# EAGLE board SolarCellX_v2 (EAGLE 9.2.2)
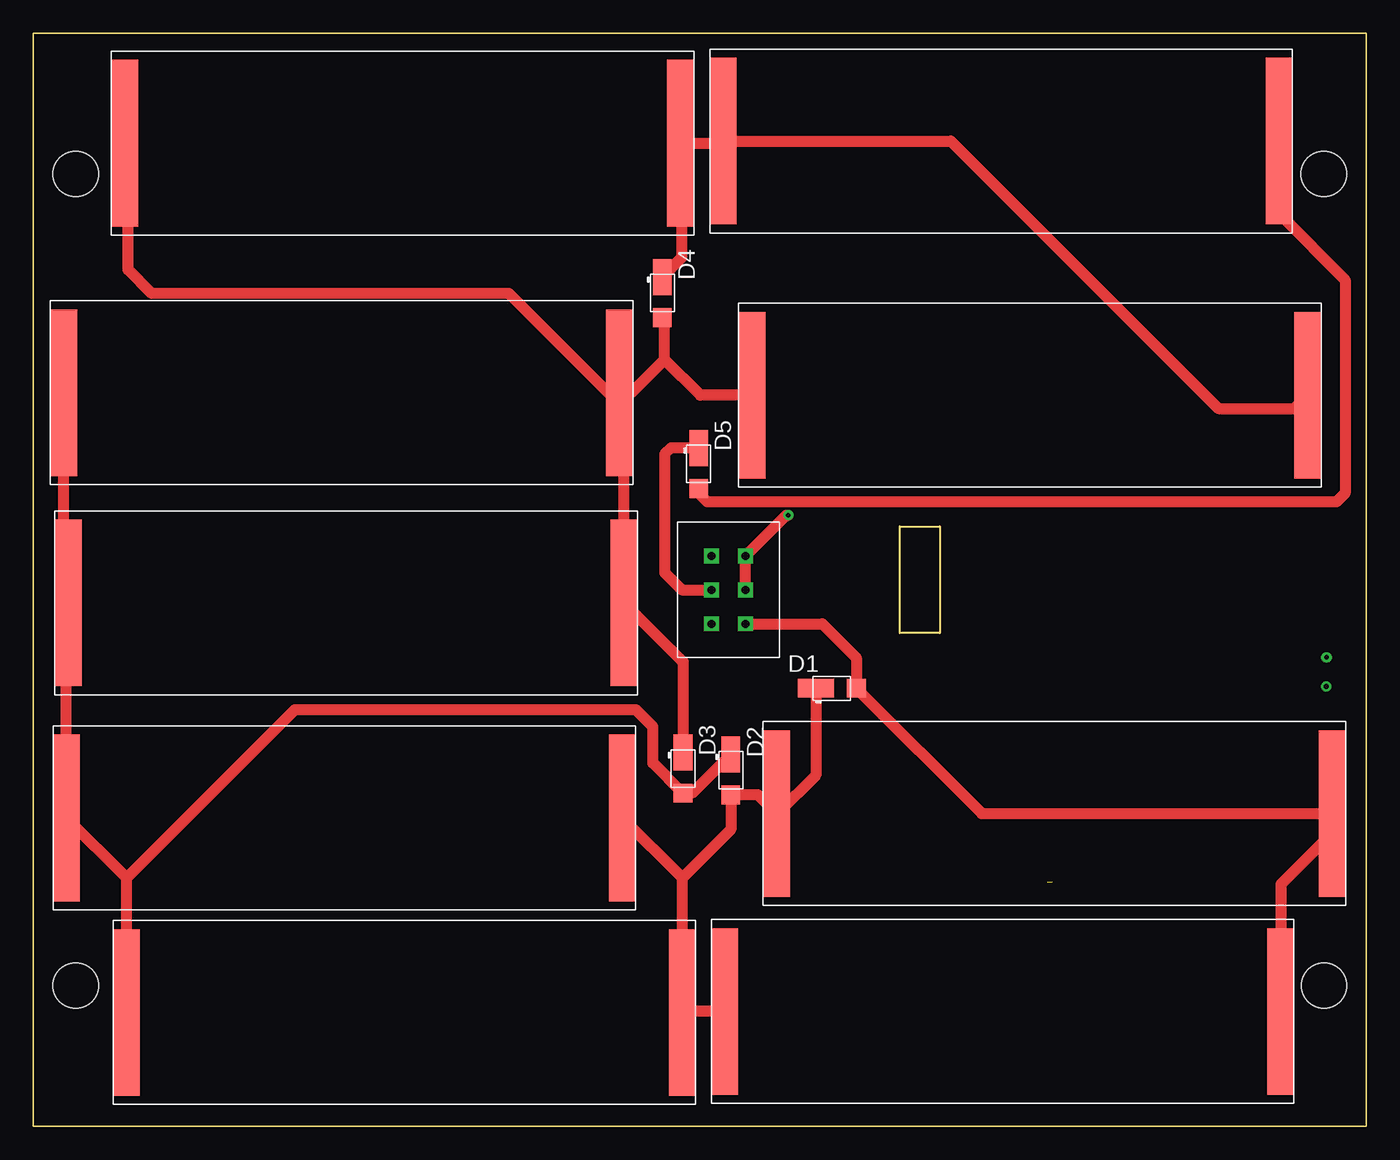
[diagram p0: board, top side]
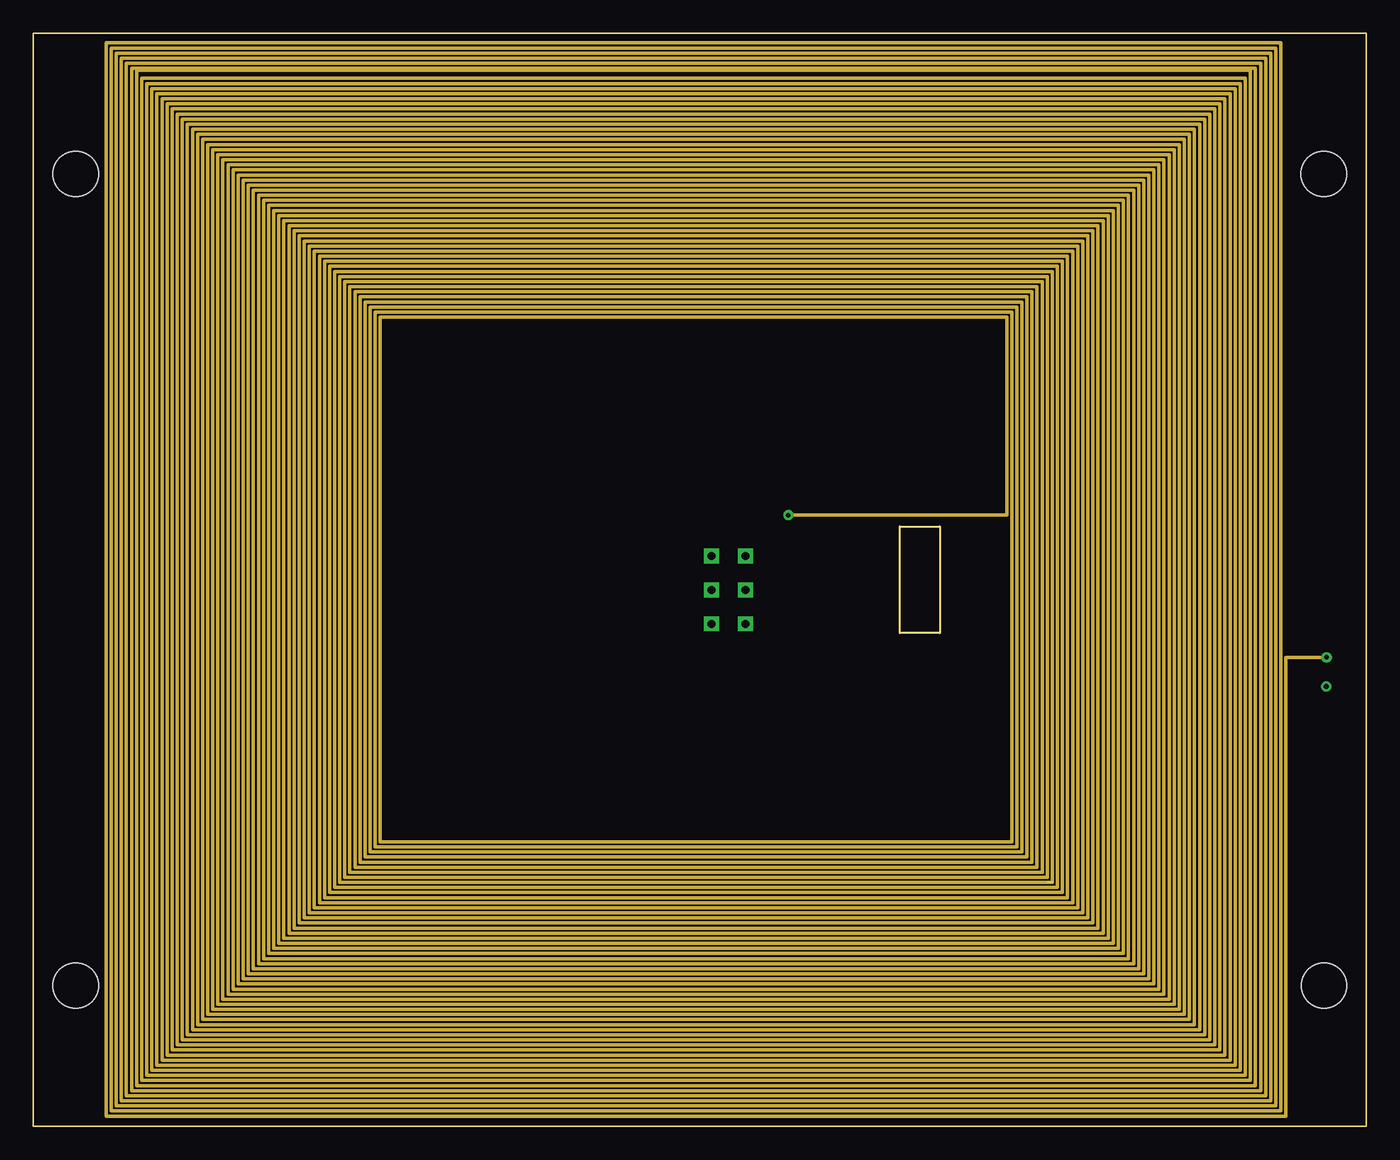
[diagram p1: board, inner layer Route2]
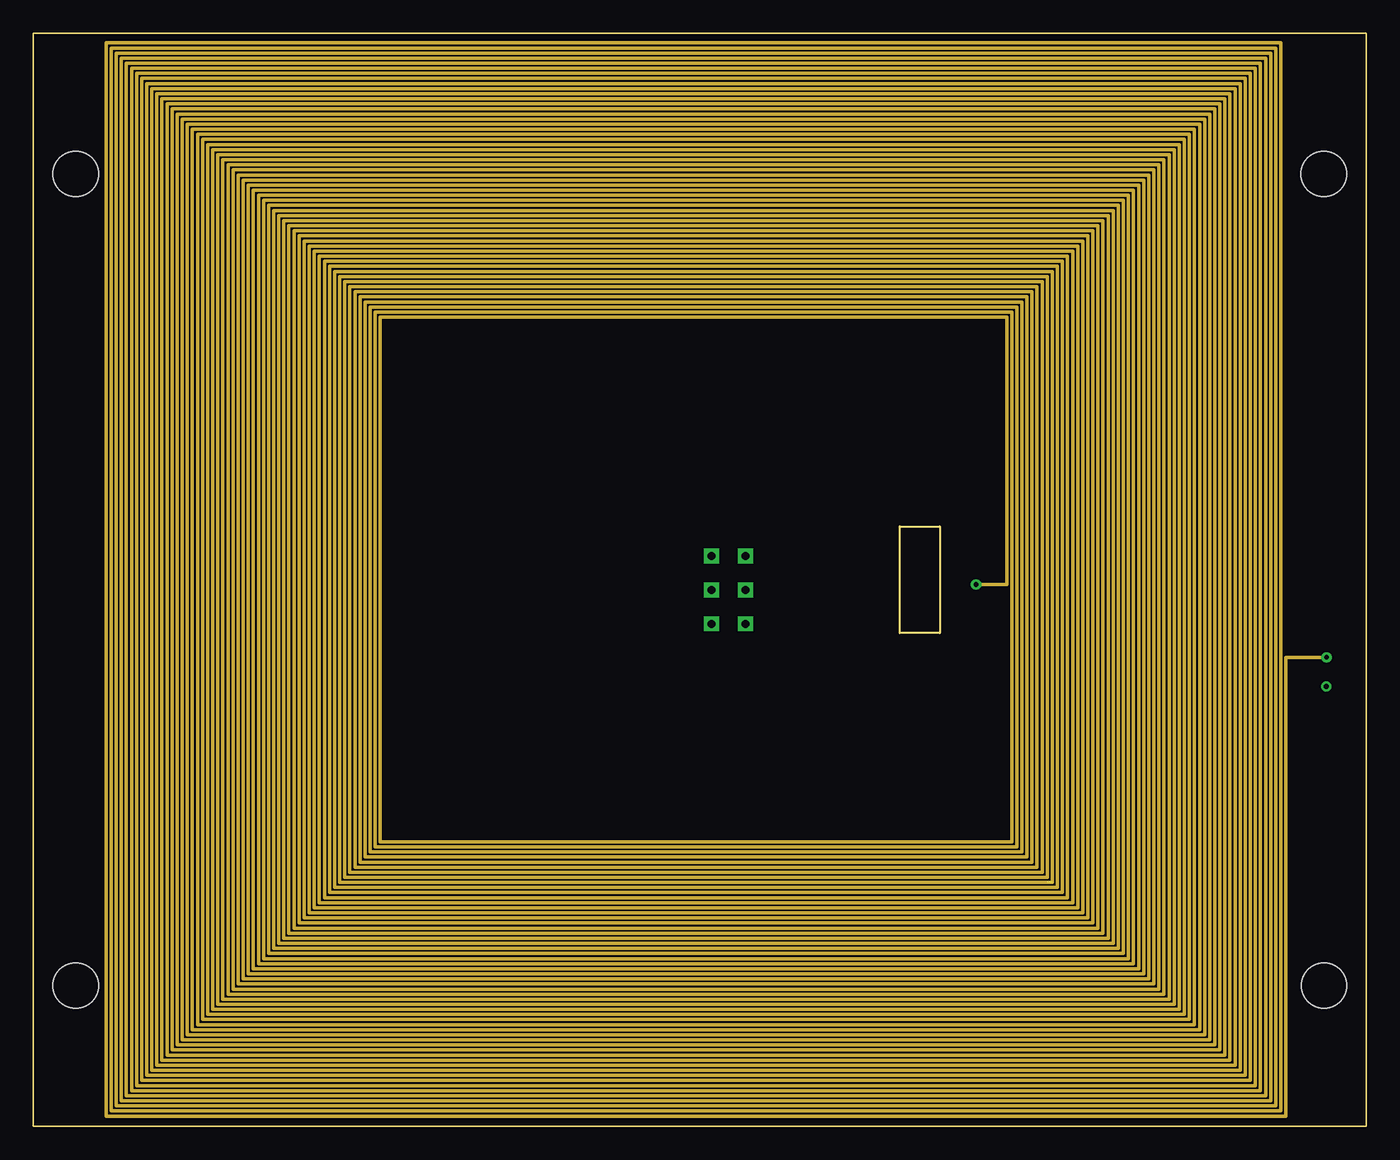
[diagram p2: board, inner layer Route15]
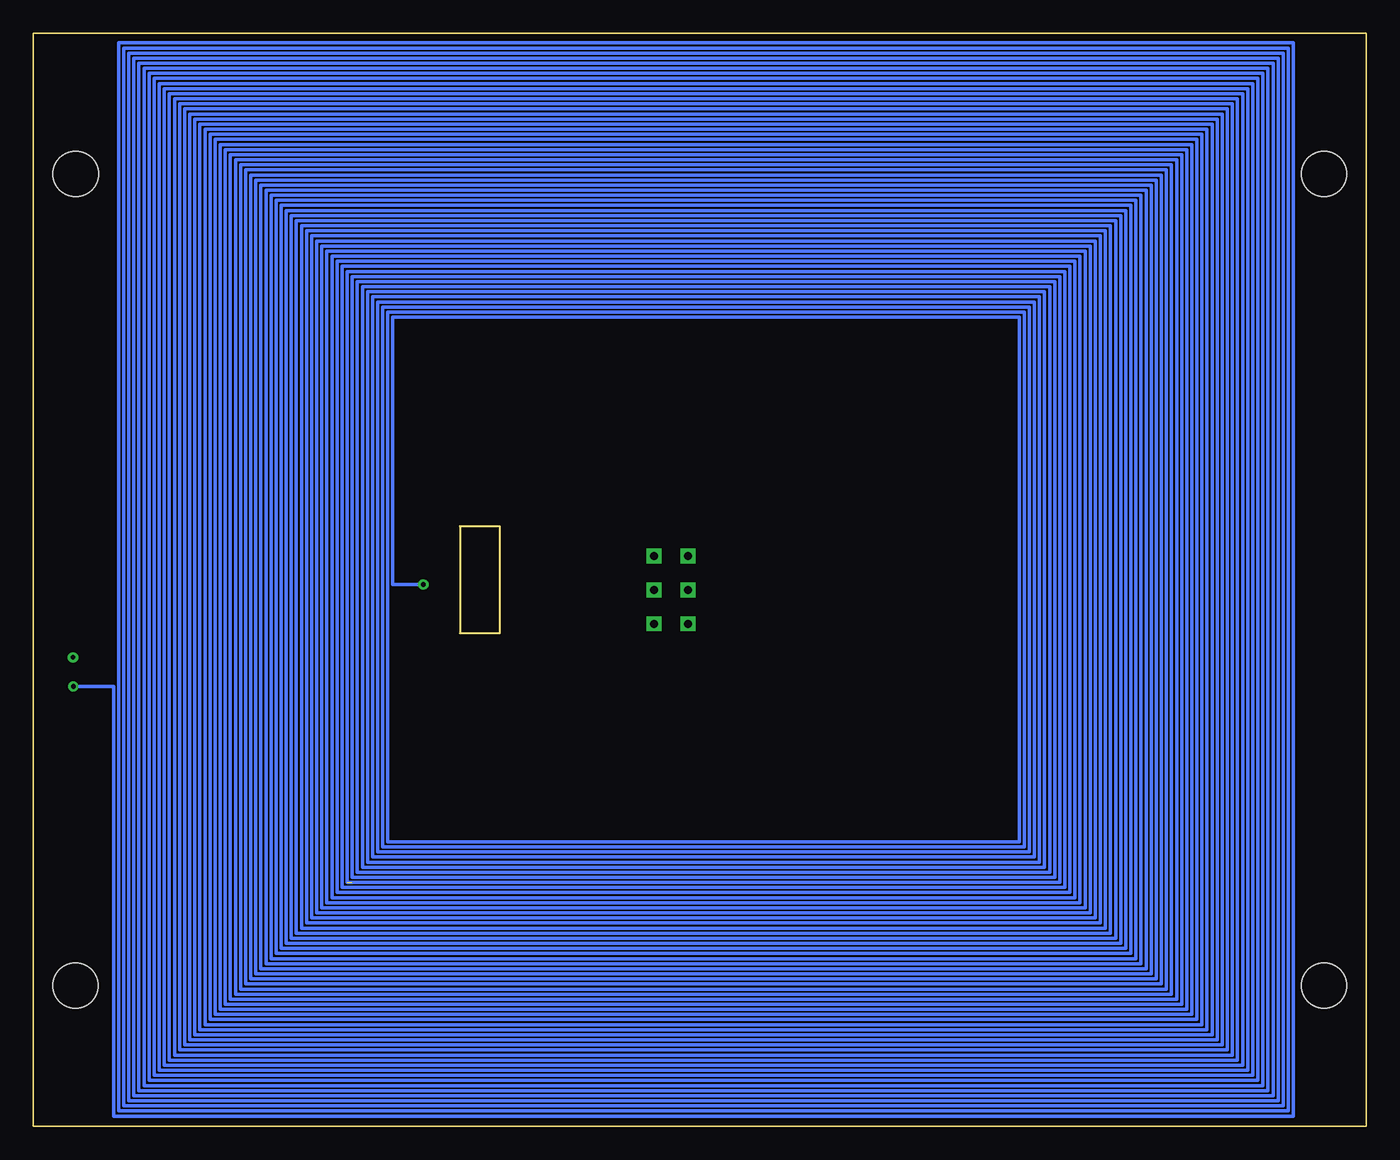
[diagram p3: board, bottom side, seen from below]

Size 100 x 82 mm. Coordinates in mm from the lower left corner, seen from the top.
Outline: 0,0 0,82 100,82 100,0 0,0
Outline: 65,45 68,45 68,37 65,37 65,45
Copper layers ([2:1+2*15+16:15]): Top 0.035559375mm / dielectric 0.17018125mm / Route2 0.01778125mm / dielectric 47mil / Route15 0.01778125mm / dielectric 0.17018125mm / Bottom 0.035559375mm
Design rules "default *": minimum track width 6mil, minimum drill 0.35mm, track to track 5mil, track to pad 6mil, pad to pad 6mil, via to via 6mil, smd to smd 6mil, copper to edge 20mil, drill to drill 6mil, minimum pad ring 10mil, minimum via ring 8mil, stop-mask expansion 4mil, vias tented up to drill 0mil, thermal gap 10mil
Holes 3.4 mm at 3.17,10.55 96.82,71.45 3.17,71.45 96.83,10.55

## Footprints (pad centres in the part's own frame; a part is rotated, then mirrored left to right if it is on the bottom)
SLMD121H04L = smd 2 x 12.5: P$1 1,6.9; P$2 42.7,6.9
SB_DIODE = smd 2.7 x 1.4: NEG -1.2,0 | smd 1.4 x 1.4: POS 1.85,0
6PIN_MOLEX = drill 0.6 square: P$1 2.54,2.54; P$2 5.08,2.54; P$3 7.62,2.54; P$4 7.62,5.08; P$5 5.08,5.08; P$6 2.54,5.08

## Placement (x,y rotation side)
1  SLMD121H04L  [SLMD121H04L]  50.77,67.02 0 top
11  SLMD121H04L  [SLMD121H04L]  94.58,15.51 180 top
12  SLMD121H04L  [SLMD121H04L]  98.46,30.36 180 top
13  SLMD121H04L  [SLMD121H04L]  49.69,15.44 180 top
14  SLMD121H04L  [SLMD121H04L]  45.18,30.03 180 top
21  SLMD121H04L  [SLMD121H04L]  1.61,32.37 0 top
22  SLMD121H04L  [SLMD121H04L]  1.28,48.13 0 top
23  SLMD121H04L  [SLMD121H04L]  5.85,66.86 0 top
24  SLMD121H04L  [SLMD121H04L]  52.92,47.95 0 top
D1  SB_DIODE  [SB_DIODE]  59.91,32.86 0 top
D2  SB_DIODE  [SB_DIODE]  52.34,26.71 270 top
D3  SB_DIODE  [SB_DIODE]  48.74,26.84 270 top
D4  SB_DIODE  [SB_DIODE]  47.19,62.52 270 top
D5  SB_DIODE  [SB_DIODE]  49.92,49.7 270 top
U$1  6PIN_MOLEX  [6PIN_MOLEX]  55.96,35.16 90 top

## Library data of the parts
1 11-14 21-24 D1-D5 U$1 = Solar

## Nets
GND: 11.P$1 12.P$1 D1.POS U$1.P$1
N$1: U$1.P$2 U$1.P$3
N$2: 11.P$2 12.P$2 13.P$1 14.P$1 D1.NEG D2.POS
N$3: 13.P$2 14.P$2 21.P$1 22.P$1 D2.NEG D3.POS
N$4: 1.P$1 23.P$2 24.P$2 D4.NEG
N$5: 21.P$2 22.P$2 23.P$1 24.P$1 D3.NEG D4.POS
N$6: 1.P$2 D5.POS
V_SOLAR: D5.NEG U$1.P$5

## Tracks (layer width: path | path; a pad name or v marks a point on that pad's centre or on a via)
GND
  Top 0.813: U$1.P$1 59.2,37.7 61.76,35.15 D1.POS 71.16,23.45 12.P$1 97.46,22.02 93.6,18.16 93.6,8.62 11.P$1
N$1  (via drill 0.35, 0.35 layers 1-2, 0.35 layers 15-16)  (1 unrouted)
  Top 0.813: U$1.P$2 U$1.P$3 56.49,45.85 v56.64,45.85
  Route2 0.152: 93.98,33 93.98,33.02
  Route2 0.254: 76.07,18.29 23.37,18.29 | v97.03,35.18 93.98,35.18 93.98,33 93.98,0.76 5.46,0.76 5.46,81.28 93.6,81.28 93.6,1.14 5.84,1.14 5.84,80.9 93.22,80.9 93.22,1.52 6.22,1.52 6.22,80.52 92.84,80.52 92.84,1.91 6.6,1.91 6.6,80.14 92.46,80.14 92.46,2.29 6.99,2.29 6.99,79.76 92.08,79.76 92.08,2.67 7.37,2.67 7.37,79.38 91.69,79.38 91.69,3.05 7.75,3.05 7.75,79.25 91.31,79.25 91.31,3.43 8.13,3.43 8.13,78.61 90.93,78.61 90.93,3.81 8.51,3.81 8.51,78.23 90.55,78.23 90.55,4.19 8.89,4.19 8.89,77.85 90.17,77.85 90.17,4.57 9.27,4.57 9.27,77.47 89.79,77.47 89.79,4.95 9.65,4.95 9.65,77.09 89.41,77.09 89.41,5.33 10.03,5.33 10.03,76.71 89.03,76.71 89.03,5.71 10.41,5.71 10.41,76.33 88.65,76.33 88.65,6.1 10.79,6.1 10.79,75.95 88.27,75.95 88.27,6.48 11.18,6.48 11.18,75.56 87.88,75.56 87.88,6.86 11.56,6.86 11.56,75.18 87.5,75.18 87.5,7.24 11.94,7.24 11.94,74.8 87.12,74.8 87.12,7.62 12.32,7.62 12.32,74.42 86.74,74.42 86.74,8 12.7,8 12.7,74.04 86.36,74.04 86.36,8.38 13.08,8.38 13.08,73.66 85.98,73.66 85.98,8.76 13.46,8.76 13.46,73.28 85.6,73.28 85.6,9.14 13.84,9.14 13.84,72.9 85.22,72.9 85.22,9.53 14.22,9.53 14.22,72.52 84.84,72.52 84.84,9.91 14.61,9.91 14.61,72.14 84.45,72.14 84.45,10.29 14.99,10.29 14.99,71.75 84.07,71.75 84.07,10.67 15.37,10.67 15.37,71.37 83.69,71.37 83.69,11.05 15.75,11.05 15.75,70.99 83.31,70.99 83.31,11.43 16.13,11.43 16.13,70.61 82.93,70.61 82.93,11.81 16.51,11.81 16.51,70.23 82.55,70.23 82.55,12.19 16.89,12.19 16.89,69.85 82.17,69.85 82.17,12.57 17.27,12.57 17.27,69.47 81.79,69.47 81.79,12.95 17.65,12.95 17.65,69.09 81.41,69.09 81.41,13.34 18.03,13.34 18.03,68.71 81.03,68.71 81.03,13.72 18.41,13.72 18.41,68.33 80.64,68.33 80.64,14.1 18.8,14.1 18.8,67.94 80.26,67.94 80.26,14.48 19.18,14.48 19.18,67.56 79.88,67.56 79.88,14.86 19.56,14.86 19.56,67.18 79.5,67.18 79.5,15.24 19.94,15.24 19.94,66.8 79.12,66.8 79.12,15.62 20.32,15.62 20.32,66.42 78.74,66.42 78.74,16 20.7,16 20.7,66.04 78.36,66.04 78.36,16.38 21.08,16.38 21.08,65.66 77.98,65.66 77.98,16.76 21.46,16.76 21.46,65.28 77.6,65.28 77.6,17.14 21.84,17.14 21.84,64.9 77.22,64.9 77.22,17.53 22.23,17.53 22.23,64.52 76.83,64.52 76.83,17.91 22.61,17.91 22.61,64.14 76.45,64.14 76.45,18.29 22.99,18.29 22.99,63.75 76.07,63.75 76.07,18.67 23.37,18.67 23.37,63.37 75.69,63.37 75.69,19.05 23.75,19.05 23.75,62.99 75.31,62.99 75.31,19.43 24.13,19.43 24.13,62.61 74.93,62.61 74.93,19.81 24.51,19.81 24.51,62.23 74.55,62.23 74.55,20.19 24.89,20.19 24.89,61.85 74.17,61.85 74.17,20.57 25.27,20.57 25.27,61.47 73.79,61.47 73.79,20.95 25.65,20.95 25.65,61.09 73.41,61.09 73.41,21.34 26.04,21.34 26.04,60.71 73.03,60.71 73.03,45.85 v56.64,45.85
  Route15 0.152: 93.98,33 93.98,33.02
  Route15 0.254: 70.61,40.64 v70.74,40.64 73.03,40.64 73.03,60.71 26.03,60.71 26.03,21.34 73.4,21.34 73.4,61.09 25.65,61.09 25.65,20.95 73.78,20.95 73.78,61.47 25.27,61.47 25.27,20.57 74.17,20.57 74.17,61.85 24.89,61.85 24.89,20.19 74.55,20.19 74.55,62.23 24.51,62.23 24.51,19.81 74.93,19.81 74.93,62.61 24.13,62.61 24.13,19.43 75.31,19.43 75.31,62.99 23.75,62.99 23.75,19.05 75.69,19.05 75.69,63.37 23.36,63.37 23.36,18.67 76.07,18.67 76.07,63.75 22.98,63.75 22.98,18.29 76.45,18.29 76.45,64.14 22.6,64.14 22.6,17.91 76.83,17.91 76.83,64.52 22.22,64.52 22.22,17.53 77.21,17.53 77.21,64.9 21.84,64.9 21.84,17.14 77.59,17.14 77.59,65.28 21.46,65.28 21.46,16.76 77.97,16.76 77.97,65.66 21.08,65.66 21.08,16.38 78.36,16.38 78.36,66.04 20.7,66.04 20.7,16 78.74,16 78.74,66.42 20.32,66.42 20.32,15.62 79.12,15.62 79.12,66.8 19.94,66.8 19.94,15.24 79.5,15.24 79.5,67.18 19.55,67.18 19.55,14.86 79.88,14.86 79.88,67.56 19.17,67.56 19.17,14.48 80.26,14.48 80.26,67.94 18.79,67.94 18.79,14.1 80.64,14.1 80.64,68.33 18.41,68.33 18.41,13.72 81.02,13.72 81.02,68.71 18.03,68.71 18.03,13.34 81.4,13.34 81.4,69.09 17.65,69.09 17.65,12.95 81.78,12.95 81.78,69.47 17.27,69.47 17.27,12.57 82.17,12.57 82.17,69.85 16.89,69.85 16.89,12.19 82.55,12.19 82.55,70.23 16.51,70.23 16.51,11.81 82.93,11.81 82.93,70.61 16.13,70.61 16.13,11.43 83.31,11.43 83.31,70.99 15.74,70.99 15.74,11.05 83.69,11.05 83.69,71.37 15.36,71.37 15.36,10.67 84.07,10.67 84.07,71.75 14.98,71.75 14.98,10.29 84.45,10.29 84.45,72.14 14.6,72.14 14.6,9.91 84.83,9.91 84.83,72.52 14.22,72.52 14.22,9.53 85.21,9.53 85.21,72.9 13.84,72.9 13.84,9.14 85.59,9.14 85.59,73.28 13.46,73.28 13.46,8.76 85.98,8.76 85.98,73.66 13.08,73.66 13.08,8.38 86.36,8.38 86.36,74.04 12.7,74.04 12.7,8 86.74,8 86.74,74.42 12.32,74.42 12.32,7.62 87.12,7.62 87.12,74.8 11.94,74.8 11.94,7.24 87.5,7.24 87.5,75.18 11.55,75.18 11.55,6.86 87.88,6.86 87.88,75.56 11.17,75.56 11.17,6.48 88.26,6.48 88.26,75.95 10.79,75.95 10.79,6.1 88.64,6.1 88.64,76.33 10.41,76.33 10.41,5.71 89.02,5.71 89.02,76.71 10.03,76.71 10.03,5.33 89.41,5.33 89.41,77.09 9.65,77.09 9.65,4.95 89.79,4.95 89.79,77.47 9.27,77.47 9.27,4.57 90.17,4.57 90.17,77.85 8.89,77.85 8.89,4.19 90.55,4.19 90.55,78.23 8.51,78.23 8.51,3.81 90.93,3.81 90.93,78.61 8.12,78.61 8.12,3.43 91.31,3.43 91.31,78.99 7.74,78.99 7.74,3.05 91.69,3.05 91.69,79.38 7.36,79.38 7.36,2.67 92.07,2.67 92.07,79.76 6.98,79.76 6.98,2.29 92.45,2.29 92.45,80.14 6.6,80.14 6.6,1.91 92.83,1.91 92.83,80.52 6.22,80.52 6.22,1.52 93.22,1.52 93.22,80.9 5.84,80.9 5.84,1.14 93.6,1.14 93.6,81.28 5.46,81.28 5.46,0.76 93.98,0.76 93.98,33 93.98,35.18 v97.03,35.18
  Bottom 0.152: 93.98,33 93.98,33.02
  Bottom 0.254: v97,33 93.98,33 93.98,0.76 5.46,0.76 5.46,81.28 93.6,81.28 93.6,1.14 5.84,1.14 5.84,80.9 93.22,80.9 93.22,1.52 6.22,1.52 6.22,80.52 92.84,80.52 92.84,1.91 6.6,1.91 6.6,80.14 92.46,80.14 92.46,2.29 6.99,2.29 6.99,79.76 92.08,79.76 92.08,2.67 7.37,2.67 7.37,79.38 91.69,79.38 91.69,3.05 7.75,3.05 7.75,78.99 91.31,78.99 91.31,3.43 8.13,3.43 8.13,78.61 90.93,78.61 90.93,3.81 8.51,3.81 8.51,78.23 90.55,78.23 90.55,4.19 8.89,4.19 8.89,77.85 90.17,77.85 90.17,4.57 9.27,4.57 9.27,77.47 89.79,77.47 89.79,4.95 9.65,4.95 9.65,77.09 89.41,77.09 89.41,5.33 10.03,5.33 10.03,76.71 89.03,76.71 89.03,5.71 10.41,5.71 10.41,76.33 88.65,76.33 88.65,6.1 10.79,6.1 10.79,75.95 88.27,75.95 88.27,6.48 11.18,6.48 11.18,75.56 87.88,75.56 87.88,6.86 11.56,6.86 11.56,75.18 87.5,75.18 87.5,7.24 11.94,7.24 11.94,74.8 87.12,74.8 87.12,7.62 12.32,7.62 12.32,74.42 86.74,74.42 86.74,8 12.7,8 12.7,74.04 86.36,74.04 86.36,8.38 13.08,8.38 13.08,73.66 85.98,73.66 85.98,8.76 13.46,8.76 13.46,73.28 85.6,73.28 85.6,9.14 13.84,9.14 13.84,72.9 85.22,72.9 85.22,9.53 14.22,9.53 14.22,72.52 84.84,72.52 84.84,9.91 14.61,9.91 14.61,72.14 84.45,72.14 84.45,10.29 14.99,10.29 14.99,71.75 84.07,71.75 84.07,10.67 15.37,10.67 15.37,71.37 83.69,71.37 83.69,11.05 15.75,11.05 15.75,70.99 83.31,70.99 83.31,11.43 16.13,11.43 16.13,70.61 82.93,70.61 82.93,11.81 16.51,11.81 16.51,70.23 82.55,70.23 82.55,12.19 16.89,12.19 16.89,69.85 82.17,69.85 82.17,12.57 17.27,12.57 17.27,69.47 81.79,69.47 81.79,12.95 17.65,12.95 17.65,69.09 81.41,69.09 81.41,13.34 18.03,13.34 18.03,68.71 81.03,68.71 81.03,13.72 18.41,13.72 18.41,68.33 80.64,68.33 80.64,14.1 18.8,14.1 18.8,67.94 80.26,67.94 80.26,14.48 19.18,14.48 19.18,67.56 79.88,67.56 79.88,14.86 19.56,14.86 19.56,67.18 79.5,67.18 79.5,15.24 19.94,15.24 19.94,66.8 79.12,66.8 79.12,15.62 20.32,15.62 20.32,66.42 78.74,66.42 78.74,16 20.7,16 20.7,66.04 78.36,66.04 78.36,16.38 21.08,16.38 21.08,65.66 77.98,65.66 77.98,16.76 21.46,16.76 21.46,65.28 77.6,65.28 77.6,17.14 21.84,17.14 21.84,64.9 77.22,64.9 77.22,17.53 22.23,17.53 22.23,64.52 76.83,64.52 76.83,17.91 22.61,17.91 22.61,64.14 76.45,64.14 76.45,18.29 22.99,18.29 22.99,63.75 76.07,63.75 76.07,18.67 23.37,18.67 23.37,63.37 75.69,63.37 75.69,19.05 23.75,19.05 23.75,62.99 75.31,62.99 75.31,19.43 24.13,19.43 24.13,62.61 74.93,62.61 74.93,19.81 24.51,19.81 24.51,62.23 74.55,62.23 74.55,20.19 24.89,20.19 24.89,61.85 74.17,61.85 74.17,20.57 25.27,20.57 25.27,61.47 73.79,61.47 73.79,20.95 25.65,20.95 25.65,61.09 73.41,61.09 73.41,21.34 26.04,21.34 26.04,60.71 73.03,60.71 73.03,40.64 v70.74,40.64 70.61,40.64
N$2
  Top 0.813: 11.P$2 48.76,8.61 13.P$1 48.69,18.62 | D1.NEG 58.71,26.32 55.84,23.45 12.P$2 54.35,24.86 D2.POS 52.34,22.27 48.69,18.62 | 48.69,18.62 14.P$1
N$3
  Top 0.813: 13.P$2 6.99,18.62 | 6.99,18.62 14.P$2 2.48,38.67 | 6.99,18.62 19.61,31.24 45.21,31.24 46.48,29.97 46.48,27.25 D3.POS 49.41,24.98 D2.NEG | 2.48,38.67 2.29,38.86 22.P$1 | 21.P$1 2.48,39.14 2.48,38.67
N$4
  Top 0.813: 51.61,73.76 23.P$2 48.55,71.72 48.64,71.63 48.64,65.17 D4.NEG | 51.61,73.76 1.P$1 68.83,73.92 88.9,53.85 94.62,53.85 24.P$2 | 51.82,73.55 51.61,73.76
N$5
  Top 0.813: D3.NEG 48.74,34.84 21.P$2 44.31,53.48 44.2,53.59 | 44.2,53.59 44.2,53.98 35.69,62.48 8.89,62.48 7.11,64.26 7.11,69.98 6.85,70.24 23.P$1 | 47.37,57.53 44.87,55.03 22.P$2 43.98,53.81 44.2,53.59 | 47.37,57.53 47.37,60.49 D4.POS | 24.P$1 50.05,54.85 47.37,57.53
N$6
  Top 0.813: 1.P$2 93.47,68.46 98.42,63.5 98.42,47.5 97.79,46.86 50.55,46.86 49.92,47.49 D5.POS
V_SOLAR
  Top 0.813: D5.NEG 47.85,50.9 47.37,50.42 47.37,41.53 48.66,40.24 U$1.P$5